# Altium PCB Dragonflyte.PcbDoc (part 2 of 3)
Units mil, origin at the board's own origin, x right, y up, seen from the top; angles counter-clockwise.
Board outline 1814.93 x 2125 mil, 6 copper layers (Component Side, Ground Plane (GND), Inner Layer 1, Inner Layer 2, Power Plane (VCC), Solder Side), stack 62.6 mil thick; 147 components, 158 nets, 1045 pads, 352 vias.
Unrouted connection lines stored in the file: 306.
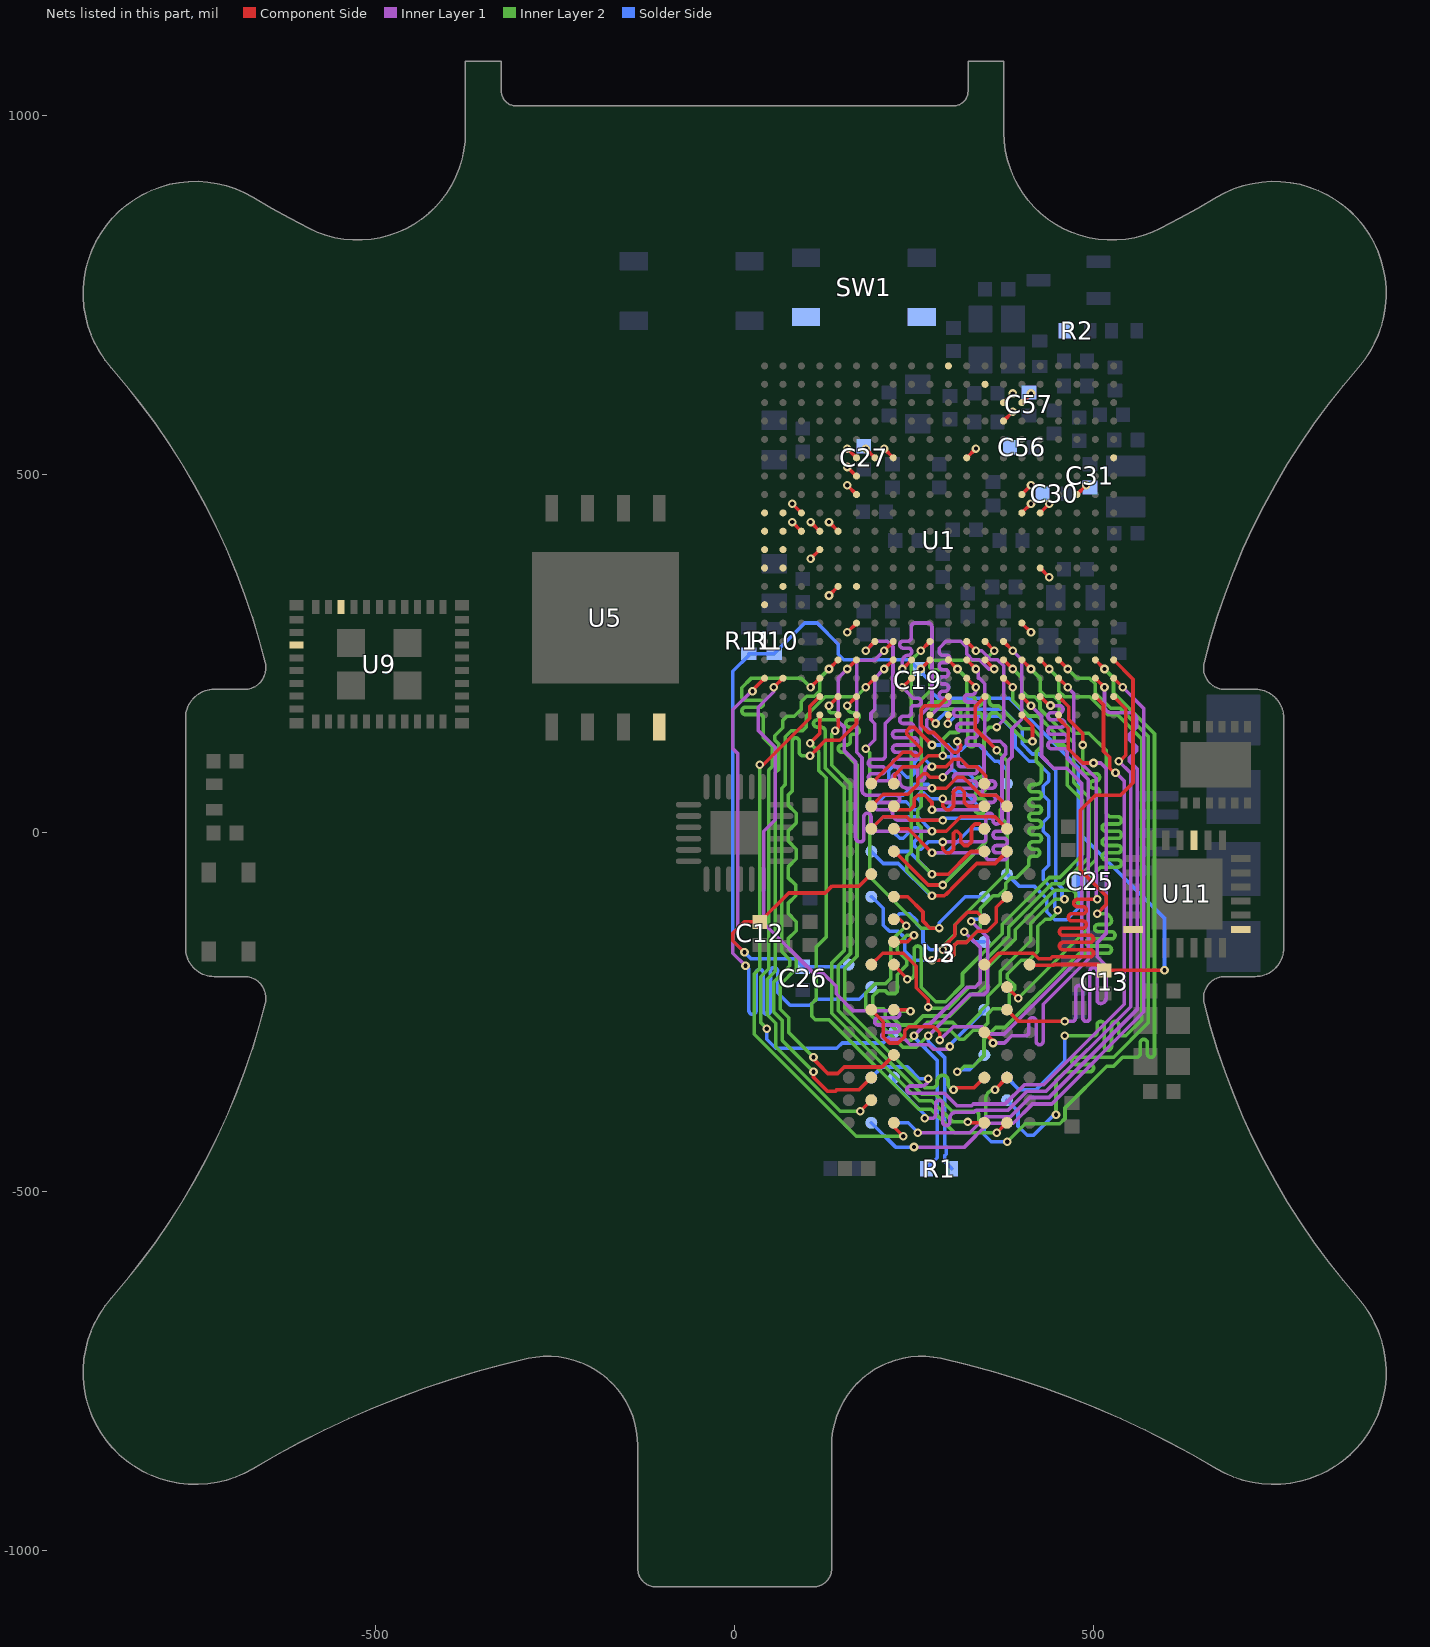
[diagram p6: the nets of this part, all layers, seen from the top]

## Via types
v1: diameter 12, hole 6, Component Side to Solder Side, tented both sides, 330 vias
v2: diameter 19.68, hole 7.87, Component Side to Solder Side, 12 vias
v3: diameter 12, hole 6, Component Side to Solder Side, 5 vias
v4: diameter 19.68, hole 11.81, Component Side to Solder Side, 5 vias

## Nets (pads, with @x,y where several pads share a name; then routed paths per layer and width w, separated by ;. In a path a pad name is that pad's centre, name@x,y a point inside that pad or via, vN(x,y) a via of type N, cw(c..) or ccw(c..) an arc to the next point about the centre after c; other vN are vias at no path point) (continued)
3V3: C56.2 C57.2 C62.2 C76.2 L1.2 R2.2 R4.2 R22.2 SW1.1 SW1.2 U1.P17 U1.P18 U1.R18 U4.1 U6.3 U8.13 U9.30 | length 54.3
  Component Side w5: U1.P17@374.39,573.84 v1(387.19,586.63) ; U1.P18@374.39,599.43 v1(387.19,612.23) ; U1.R18@399.98,599.43 v1(412.78,612.23)
3V3_SLOW: C27.2 C28.2 C29.2 C30.2 C31.2 C65.1 C74.1 C81.2 C83.2 L3.2 R14.2 R15.2 R16.2 R17.2 R18.2 R20.2 R21.2 R29.2 U1.E11 U1.F6 U1.F8 U1.F13 U1.F14 U1.F15 U1.G15 U1.H15 U1.L20 U1.M15 U1.N19 U1.R6 U1.R12 U1.R13 U1.T9 U1.T12 U1.V13 U1.Y15 U5.8 U7.10 U9.36 U11.1 U11.9 U11.18 | length 253.3
  Component Side w5: v1(131.28,433.09) U1.E11@144.07,420.3 ; v1(156.87,279.55) U1.F6@169.66,292.34 ; v1(156.87,484.27) U1.F13@169.66,471.48 ; v1(156.87,509.86) U1.F14@169.66,497.07 ; v1(156.87,535.45) U1.F15@169.66,522.66 ; v1(182.46,535.45) U1.G15@195.26,522.66 ; v1(208.05,535.45) U1.H15@220.85,522.66 ; U1.M15@323.21,522.66 v1(336,535.45) ; U1.R6@399.98,292.34 v1(412.78,279.55) ; U1.R12@399.98,445.89 v1(412.78,458.68) ; U1.R13@399.98,471.48 v1(412.78,484.27) ; U1.T9@425.57,369.11 v1(438.37,356.32) ; U1.T12@425.57,445.89 v1(438.37,458.68) ; U1.V13@476.75,471.48 v1(489.55,484.27)
CSI_D0: U1.D10 | length 18.1
  Component Side w5: v1(105.69,381.91) U1.D10@118.48,394.7
CSI_D1: U1.B8
CSI_D2: U1.C11 | length 18.1
  Component Side w5: v1(80.1,433.09) U1.C11@92.89,420.3
CSI_D3: U1.A9
CSI_D4: U1.A11
CSI_D5: U1.D11 | length 18.1
  Component Side w5: v1(105.69,433.09) U1.D11@118.48,420.3
CSI_D6: U1.B9
CSI_D7: U1.A12
CSI_D8: U1.A10
CSI_D9: U1.C12 | length 18.1
  Component Side w5: v1(80.1,458.68) U1.C12@92.89,445.89
CSI_D10: U1.E8 | length 18.1
  Component Side w5: v1(131.28,330.73) U1.E8@144.07,343.52
CSI_D11: U1.A7
CSI_HSYNC: U1.B12
CSI_PIXCLK: U1.B11
CSI_VSYNC: U1.B10
DDR_VREF: C12.2 C13.2 C19.2 C25.2 C26.2 R10.1 R11.2 U1.K4 U2.H1 U2.M8 U3.H1 U3.M8 | length 2214.3
  Component Side w5: v3(13.68,-166) 13.32,-166 -2.5,-150.18 -2.5,-139.82 13.46,-123.86 C12.2@35,-123.86 75.22,-83.64 126,-83.64 135.65,-73.99 173.61,-73.99 U2.M8@190.33,-57.26 ; v1(259.23,228.37) U1.K4@272.03,241.16 ; U2.H1@410.81,-183.25 411.56,-184 444.48,-184 445.23,-183.25 506.71,-183.25 C13.2@514.82,-191.36 v3(598.64,-191.36)
  Solder Side w5: U3.H1@158.84,-183.25 155.59,-186.5 94.96,-186.5 C26.2@94.82,-186.36 83.46,-175 22.68,-175 v3(13.68,-166) 13.32,-166 -2.5,-150.18 -2.5,225.18 19.82,247.5 R11.2@19.82,249.78 R10.1@54.82,249.78 97.54,292.5 114.82,292.5 144.37,262.95 144.37,248.78 151.69,241.46 242.01,241.46 C19.2@254.82,228.64 272.5,210.97 272.5,198.23 283.23,187.5 382.5,187.5 478.68,91.32 478.68,1.32 ; U3.M8@379.31,-57.26 396.04,-73.99 416.92,-73.99 434.57,-91.64 434.57,-109.93 445.64,-121 462.46,-121 478.68,-104.78 C25.2@478.68,-67.5 478.68,1.32 ; v3(598.64,-191.36) 598.64,-118.64 478.68,1.32
DRAM_A0: U1.N5 U2.N3 U3.N3 | length 623.1
  Component Side w5: v1(274.82,-57.5) 297.55,-57.5 327.19,-27.86 329.28,-25.77 U2.N3@347.81,-25.77 ; U1.N5@348.8,266.75 v1(361.59,253.96)
  Inner Layer 2 w5: v1(274.82,-57.5) 255.14,-37.82 255.14,-22.18 259.82,-17.5 259.82,7.82 255.14,12.5 255.14,32.5 259.82,37.18 259.82,185.69 271.73,197.6 271.73,212.5 cw(c276.73,212.5) 276.73,217.5 292.91,217.5 ccw(c292.91,222.5) 297.91,222.5 ccw(c292.91,222.5) 292.91,227.5 276.73,227.5 cw(c276.73,232.5) 271.73,232.5 cw(c280.1,232.5) 280.1,240.87 348.5,240.87 v1(361.59,253.96)
  Solder Side w5: U3.N3@221.83,-25.77 243.09,-25.77 v1(274.82,-57.5)
DRAM_A1: U1.P5 U2.P7 U3.P7 | length 648.2
  Component Side w5: U2.P7@221.83,5.73 241.59,5.73 v1(274.82,-27.5) ; U1.P5@374.39,266.75 v1(387.19,253.96)
  Inner Layer 1 w5: v1(274.82,-27.5) 344.82,-27.5 cw(c344.82,-32.5) 349.82,-32.5 ccw(c354.82,-32.5) 354.82,-37.5 374.82,-37.5 ccw(c374.82,-32.5) 379.82,-32.5 ccw(c374.82,-32.5) 374.82,-27.5 364.82,-27.5 cw(c364.82,-22.5) 359.82,-22.5 cw(c364.82,-22.5) 364.82,-17.5 374.82,-17.5 ccw(c374.82,-12.5) 379.82,-12.5 ccw(c374.82,-12.5) 374.82,-7.5 364.82,-7.5 cw(c364.82,-2.5) 359.82,-2.5 cw(c364.82,-2.5) 364.82,2.5 374.82,2.5 ccw(c374.82,9) 381.32,9 381.32,101.27 386.32,106.27 386.32,145.08 399.82,158.58 399.82,241.32 v1(387.19,253.96)
  Solder Side w5: v1(274.82,-27.5) 294.82,-27.5 328.05,5.73 U3.P7@347.81,5.73
DRAM_A2: U1.M4 U2.P3 U3.P3 | length 649.3
  Component Side w5: v1(289.82,-12.5) 289.82,-22.5 294.82,-27.5 299.82,-27.5 304.82,-22.5 304.82,-0.23 307.55,2.5 309.82,2.5 314.82,-2.5 314.82,-12.5 319.82,-17.5 324.82,-17.5 329.82,-12.5 329.82,7.5 334.82,12.5 341.04,12.5 U2.P3@347.81,5.73 ; U1.M4@323.21,241.16 v1(336,228.37)
  Inner Layer 1 w5: v1(289.82,-12.5) 344.82,-12.5 ccw(c344.82,-7.5) 349.82,-7.5 349.82,22.5 cw(c354.82,22.5) 354.82,27.5 cw(c354.82,22.5) 359.82,22.5 359.82,17.5 ccw(c364.82,17.5) 364.82,12.5 ccw(c364.82,20) 372.32,20 372.32,105 377.32,110 377.32,120.36 370,127.68 356.97,127.68 348.5,136.14 348.5,207.95 341.18,215.27 339.5,215.27 339.5,224.87 v1(336,228.37)
  Solder Side w5: U3.P3@221.83,5.73 221.83,0.49 229.82,-7.5 234.82,-7.5 249.82,7.5 254.82,7.5 259.82,2.5 259.82,-2.5 249.82,-12.5 249.82,-17.5 254.82,-22.5 259.82,-22.5 269.82,-12.5 v1(289.82,-12.5)
DRAM_A3: U1.K5 U2.N2 U3.N2 | length 622.4
  Component Side w5: v1(259.23,253.96) U1.K5@272.03,266.75 ; v1(274.82,-87.5) 292.09,-87.5 294.59,-85 295,-85 302.32,-77.68 302.32,-77.27 337.1,-42.5 353.94,-42.5 362.58,-42.5 U2.N2@379.31,-25.77
  Inner Layer 2 w5: v1(259.23,253.96) 246.14,240.87 246.14,-26.18 239.82,-32.5 239.82,-52.5 v1(274.82,-87.5)
  Solder Side w5: U3.N2@190.33,-25.77 207.06,-42.5 227.95,-42.5 272.95,-87.5 v1(274.82,-87.5)
DRAM_A4: U1.H5 U2.P8 U3.P8 | length 655.9
  Component Side w5: U2.P8@190.33,5.73 207.06,22.46 227.95,22.46 227.99,22.5 239.82,22.5 244.82,17.5 v1(289.82,17.5) ; v1(208.05,253.96) U1.H5@220.85,266.75
  Inner Layer 1 w5: 169.96,112.32 177.28,105 177.28,60.04 ccw(c184.82,60.04) 184.82,52.5 224.82,52.5 cw(c224.82,47.5) 229.82,47.5 cw(c224.82,47.5) 224.82,42.5 199.82,42.5 ccw(c199.82,37.5) 194.82,37.5 ccw(c199.82,37.5) 199.82,32.5 214.82,32.5 cw(c214.82,27.5) 219.82,27.5 ccw(c229.82,27.5) 229.82,17.5 v1(289.82,17.5) ; 169.96,112.36 169.82,112.5 169.82,237.5 173.19,240.87 194.96,240.87 v1(208.05,253.96)
  Solder Side w5: v1(289.82,17.5) 292.82,20.5 364.54,20.5 U3.P8@379.31,5.73
DRAM_A5: U1.F4 U2.P2 U3.P2 | length 653.6
  Component Side w5: v1(156.87,228.37) U1.F4@169.66,241.16 ; v1(274.82,2.5) 294.82,2.5 314.78,22.46 362.58,22.46 U2.P2@379.31,5.73
  Inner Layer 1 w5: v1(156.87,228.37) 144.37,215.87 144.37,155.63 152.32,147.68 152.32,115 168.28,99.04 168.28,-5.96 ccw(c174.82,-5.96) 174.82,-12.5 ccw(c174.82,-7.5) 179.82,-7.5 179.82,22.5 cw(c184.82,22.5) 184.82,27.5 cw(c184.82,22.5) 189.82,22.5 189.82,7.5 ccw(c194.82,7.5) 194.82,2.5 v1(274.82,2.5)
  Solder Side w5: U3.P2@190.33,5.73 207.06,22.46 227.95,22.46 227.99,22.5 254.82,22.5 v1(274.82,2.5)
DRAM_A6: U1.N4 U2.R8 U3.R8 | length 653.7
  Component Side w5: U2.R8@190.33,37.22 207.06,53.95 241.28,53.95 254.82,67.5 254.82,74.77 262.55,82.5 267.14,82.5 272.14,77.5 v1(289.82,77.5) ; U1.N4@348.8,241.16 v1(361.59,228.37)
  Inner Layer 1 w5: v1(289.82,77.5) 302.32,90 302.32,112.68 280,135 279.64,135 267.32,147.32 267.32,157.68 287.14,177.5 294.82,177.5 ccw(c294.82,182.5) 299.82,182.5 ccw(c294.82,182.5) 294.82,187.5 289.82,187.5 cw(c289.82,192.5) 284.82,192.5 cw(c289.82,192.5) 289.82,197.5 292.91,197.5 ccw(c292.91,202.5) 297.91,202.5 ccw(c292.91,202.5) 292.91,207.5 289.82,207.5 cw(c289.82,212.5) 284.82,212.5 cw(c289.82,212.5) 289.82,217.5 292.91,217.5 ccw(c292.91,222.5) 297.91,222.5 ccw(c292.91,222.5) 292.91,227.5 289.82,227.5 cw(c289.82,232.5) 284.82,232.5 cw(c289.82,232.5) 289.82,237.5 295.87,237.5 ccw(c295.87,241.46) 299.82,241.46 299.82,242.5 ccw(c294.82,242.5) 294.82,247.5 289.82,247.5 cw(c289.82,252.5) 284.82,252.5 284.82,257.5 294.37,267.05 315,267.05 323.5,258.54 323.5,248.78 330.83,241.46 340.59,241.46 353.68,228.37 v1(361.59,228.37)
  Solder Side w5: v1(289.82,77.5) 299.82,87.5 304.82,87.5 309.82,82.5 326.27,82.5 333.05,75.72 333.05,62.6 343.15,52.5 364.03,52.5 U3.R8@379.31,37.22
DRAM_A7: U1.G5 U2.R2 U3.R2 | length 647.3
  Component Side w5: v1(182.46,253.96) U1.G5@195.26,266.75 ; v1(274.82,62.5) 294.82,62.5 309.82,77.5 318.15,77.5 343.15,52.5 364.03,52.5 U2.R2@379.31,37.22
  Inner Layer 1 w5: v1(182.46,253.96) 195.55,267.05 212.64,267.05 220.55,259.13 220.55,163.23 209.82,152.5 209.82,107.5 cw(c204.82,107.5) 204.82,102.5 191.28,102.5 ccw(c191.28,97.5) 186.28,97.5 ; 186.28,96.04 186.28,97.5 ; v1(274.82,62.5) 239.82,62.5 cw(c239.82,72.5) 229.82,72.5 229.82,77.5 ccw(c224.82,77.5) 224.82,82.5 ccw(c224.82,77.5) 219.82,77.5 cw(c214.82,77.5) 214.82,72.5 191.28,72.5 cw(c191.28,77.5) 186.28,77.5 cw(c191.28,77.5) 191.28,82.5 204.82,82.5 ccw(c204.82,87.5) 209.82,87.5 ccw(c204.82,87.5) 204.82,92.5 191.28,92.5 cw(c191.28,97.5) 186.28,97.5
  Solder Side w5: U3.R2@190.33,37.22 194.55,37.22 209.82,52.5 234.82,52.5 249.82,67.5 269.82,67.5 v1(274.82,62.5)
DRAM_A8: U1.J4 U2.T8 U3.T8 | length 650.6
  Component Side w5: U2.T8@196.04,68.72 U2.T8@190.33,68.72 234.11,112.5 244.82,112.5 249.82,107.5 254.82,107.5 259.82,112.5 259.82,117.5 239.82,137.5 239.82,142.5 244.82,147.5 249.82,147.5 v1(274.82,122.5) ; v1(233.64,228.37) U1.J4@246.44,241.16
  Inner Layer 1 w5: v1(233.64,228.37) 233.64,239.41 cw(c241.73,239.41) 241.73,247.5 ccw(c241.73,252.5) 246.73,252.5 ccw(c241.73,252.5) 241.73,257.5 234.82,257.5 cw(c234.82,262.5) 229.82,262.5 cw(c234.37,262.5) 234.37,267.05 240.69,267.05 ccw(c240.69,272.5) 246.14,272.5 246.14,287.5 cw(c251.14,287.5) 251.14,292.5 269.82,292.5 cw(c269.82,287.5) 274.82,287.5 274.82,180.23 258.32,163.73 258.32,139 v1(274.82,122.5)
  Solder Side w5: v1(274.82,122.5) 297.32,122.5 297.32,122.32 304.64,115 315,115 322.32,122.32 322.32,122.5 339.82,122.5 362.32,100 367.5,100 379.82,87.68 379.82,69.23 U3.T8@379.31,68.72
DRAM_A9: U1.L2 U2.R3 U3.R3 | length 636.1
  Component Side w5: v1(289.82,47.5) 289.82,37.5 294.82,32.5 299.82,32.5 304.82,37.5 304.82,57.5 309.82,62.5 314.82,62.5 319.82,57.5 319.82,42.5 325.1,37.22 U2.R3@347.81,37.22 ; U1.L2@297.62,189.98 284.82,177.19 264.51,177.19 259.82,172.5 259.82,150.23 270.05,140 277.32,140 304.82,112.5 309.82,112.5 314.82,117.5 314.82,122.5 v1(309.82,127.5)
  Inner Layer 1 w5: v1(289.82,47.5) ccw(c294.82,47.5) 294.82,42.5 329.82,42.5 ccw(c329.82,47.5) 334.82,47.5 ccw(c329.82,47.5) 329.82,52.5 309.82,52.5 cw(c309.82,57.5) 304.82,57.5 cw(c309.82,57.5) 309.82,62.5 332.37,62.5 ccw(c332.37,67.5) 337.37,67.5 ccw(c332.37,67.5) 332.37,72.5 309.82,72.5 cw(c309.82,77.5) 304.82,77.5 cw(c309.82,77.5) 309.82,82.5 333.32,82.5 ccw(c333.32,87.5) 338.32,87.5 ccw(c333.32,87.5) 333.32,92.5 314.82,92.5 cw(c314.82,96) 311.32,96 311.32,126 v1(309.82,127.5)
  Solder Side w5: U3.R3@221.83,37.22 228.11,43.5 238.82,43.5 249.82,32.5 254.82,32.5 259.82,37.5 259.82,42.5 254.82,47.5 254.82,52.5 258.48,56.16 263.48,56.16 272.14,47.5 v1(289.82,47.5)
DRAM_A10: U1.H4 U2.L7 U3.L7 | length 624.8
  Component Side w5: v1(208.05,228.37) U1.H4@220.85,241.16 ; U2.L7@221.83,-88.76 241.08,-88.76 262.32,-110 262.32,-122.68 272.14,-132.5 v1(284.82,-132.5)
  Inner Layer 1 w5: v1(182.46,117.5) 194.96,130 194.96,152.36 189.82,157.5 189.82,166.87 194.96,172.01 194.96,215.27 v1(208.05,228.37)
  Inner Layer 2 w5: v1(182.46,117.5) 188.32,111.64 188.32,-61 259.82,-132.5 v1(284.82,-132.5)
  Solder Side w5: v1(284.82,-132.5) 284.82,-125.18 321.24,-88.76 U3.L7@347.81,-88.76
DRAM_A11: U1.M3 U2.R7 U3.R7 | length 655.7
  Component Side w5: U2.R7@221.83,37.22 226.55,32.5 244.82,32.5 249.82,37.5 249.82,47.5 254.82,52.5 264.82,52.5 274.82,42.5 v1(274.82,32.5) ; U1.M3@323.21,215.57 v1(336,202.77)
  Inner Layer 1 w5: v1(274.82,32.5) 339.82,32.5 349.82,42.5 358.32,42.5 ccw(c358.32,47.5) 363.32,47.5 ccw(c358.32,47.5) 358.32,52.5 349.73,52.5 cw(c349.73,57.41) 344.82,57.41 cw(c349.92,57.41) 349.92,62.5 358.32,62.5 ccw(c358.32,67.5) 363.32,67.5 ccw(c358.32,67.5) 358.32,72.5 353.57,72.5 cw(c353.57,78.75) 347.32,78.75 347.32,115 ccw(c339.82,115) 339.82,122.5 327.32,122.5 cw(c327.32,127.5) 322.32,127.5 cw(c327.32,127.5) 327.32,132.5 333.32,132.5 ccw(c333.32,137.5) 338.32,137.5 ccw(c333.32,137.5) 333.32,142.5 314.32,142.5 cw(c314.32,147.5) 309.32,147.5 cw(c314.32,147.5) 314.32,152.5 333.32,152.5 ccw(c333.32,157.5) 338.32,157.5 ccw(c333.32,157.5) 333.32,162.5 309.82,162.5 cw(c309.82,167.5) 304.82,167.5 cw(c309.82,167.5) 309.82,172.5 333.32,172.5 ccw(c333.32,177.5) 338.32,177.5 ccw(c333.32,177.5) 333.32,182.5 324.82,182.5 cw(c324.82,187.5) 319.82,187.5 cw(c324.82,187.5) 324.82,192.5 329.82,192.5 ccw(c329.82,198.68) 336,198.68 v1(336,202.77) v1@334.82,201.59
  Solder Side w5: v1(274.82,32.5) 294.82,32.5 304.82,42.5 304.82,52.5 309.82,57.5 319.82,57.5 340.1,37.22 U3.R7@347.81,37.22
DRAM_A12: U1.M5 U2.N7 U3.N7 | length 638.5
  Component Side w5: U2.N7@221.83,-25.77 223.09,-25.77 269.82,-72.5 v1(289.82,-72.5) ; U1.M5@323.21,266.75 v1(336,253.96)
  Inner Layer 1 w5: v1(336,253.96) 343.92,253.96 356.42,241.46 366.18,241.46 374.69,232.95 374.69,197.6 374.82,197.46 374.82,157.5 v1(364.82,147.5)
  Inner Layer 2 w5: v1(289.82,-72.5) 349.82,-12.5 349.82,22.5 ccw(c344.82,22.5) 344.82,27.5 339.82,27.5 cw(c339.82,32.5) 334.82,32.5 cw(c339.82,32.5) 339.82,37.5 344.82,37.5 ccw(c344.82,42.5) 349.82,42.5 ccw(c344.82,42.5) 344.82,47.5 339.82,47.5 cw(c339.82,52.5) 334.82,52.5 cw(c339.82,52.5) 339.82,57.5 344.82,57.5 ccw(c344.82,62.5) 349.82,62.5 ccw(c344.82,62.5) 344.82,67.5 339.82,67.5 cw(c339.82,72.5) 334.82,72.5 cw(c339.82,72.5) 339.82,77.5 ccw(c339.82,85) 347.32,85 347.32,140 354.82,147.5 v1(364.82,147.5)
  Solder Side w5: v1(289.82,-72.5) 336.55,-25.77 U3.N7@347.81,-25.77
DRAM_A13: U1.J3 U2.T3 U3.T3 | length 634.5
  Component Side w5: v1(233.64,202.77) U1.J3@246.44,215.57 ; v1(274.82,92.5) 294.82,92.5 304.82,102.5 314.82,102.5 324.82,92.5 337.14,92.5 349.82,79.82 349.82,70.73 U2.T3@347.81,68.72
  Inner Layer 1 w5: 229.82,157.5 ccw(c234.82,157.5) 234.82,152.5 ; v1(233.64,202.77) 248.92,187.5 254.82,187.5 cw(c254.82,182.5) 259.82,182.5 cw(c254.82,182.5) 254.82,177.5 249.82,177.5 ccw(c249.82,173.82) 246.14,173.82 246.14,167.5 cw(c241.14,167.5) 241.14,162.5 234.82,162.5 ccw(c234.82,157.5) 234.82,152.5 ; v1(274.82,92.5) 269.82,92.5 ccw(c269.82,87.5) 264.82,87.5 264.82,77.5 cw(c259.82,77.5) 259.82,72.5 cw(c259.82,77.5) 254.82,77.5 254.82,87.5 ccw(c249.82,87.5) 249.82,92.5 224.82,92.5 cw(c224.82,97.5) 219.82,97.5 cw(c224.82,97.5) 224.82,102.5 249.82,102.5 ccw(c249.82,107.5) 254.82,107.5 ccw(c249.82,107.5) 249.82,112.5 224.82,112.5 cw(c224.82,117.5) 219.82,117.5 cw(c224.82,117.5) 224.82,122.5 249.82,122.5 ccw(c249.82,127.5) 254.82,127.5 ccw(c249.82,127.5) 249.82,132.5 224.82,132.5 cw(c224.82,137.5) 219.82,137.5 cw(c224.82,137.5) 224.82,142.5 243.82,142.5 ccw(c243.82,148) 249.32,148 ccw(c244.82,148) 244.82,152.5 234.82,152.5
  Solder Side w5: U3.T3@221.83,68.72 214.82,75.73 214.82,87.5 219.82,92.5 224.82,92.5 239.82,77.5 244.82,77.5 249.82,82.5 249.82,97.5 254.82,102.5 264.82,102.5 v1(274.82,92.5)
DRAM_A14: U1.R1 U2.T7 U3.T7 | length 624.1
  Component Side w5: U2.T7@221.83,68.72 223.05,67.5 223.05,80.73 234.82,92.5 254.82,92.5 269.82,107.5 v1(289.82,107.5) ; U1.R1@399.98,164.39 399.82,164.23 414.82,149.23 v1(414.82,127.5)
  Inner Layer 2 w5: v1(289.82,107.5) 289.82,130.18 299.64,140 cw(c299.82,127.5) 299.82,140 309.32,140 ccw(c309.32,145.5) 314.82,145.5 314.82,167.5 ccw(c309.82,167.5) 309.82,172.5 274.82,172.5 cw(c274.82,177.5) 269.82,177.5 cw(c274.82,177.5) 274.82,182.5 319.82,182.5 cw(c319.82,177.5) 324.82,177.5 324.82,125 ccw(c329.82,125) 329.82,120 ccw(c329.82,125) 334.82,125 334.82,162.5 cw(c339.82,162.5) 339.82,167.5 cw(c339.82,162.5) 344.82,162.5 ccw(c349.82,162.5) 349.82,157.5 ccw(c349.82,162.5) 354.82,162.5 cw(c359.82,162.5) 359.82,167.5 364.82,167.5 404.82,127.5 v1(414.82,127.5)
  Solder Side w5: v1(289.82,107.5) 291.32,106 311.32,106 324.82,92.5 339.82,92.5 347.32,85 347.32,69.21 U3.T7@347.81,68.72
DRAM_CAS: U1.N2 U2.K3 U3.K3 | length 622.6
  Component Side w5: v1(289.82,-162.5) 292.14,-162.5 292.14,-157.45 306.32,-143.27 306.32,-128.32 317.32,-117.32 324.37,-110.28 337.83,-110.28 U2.K3@347.81,-120.26 ; U1.N2@348.8,189.98 334.82,176 334.82,145.63 364.82,115.63 v1(364.82,115.18)
  Inner Layer 2 w5: v1(289.82,-162.5) 289.82,-157.91 307.32,-140.41 307.32,-127.32 379.82,-54.82 379.82,12.5 369.82,22.5 369.82,32.5 379.82,42.5 379.82,100.18 v1(364.82,115.18)
  Solder Side w5: U3.K3@221.83,-120.26 229.59,-112.5 243.96,-112.5 253.32,-121.86 253.32,-126.41 262.32,-135.41 262.32,-152.68 272.14,-162.5 v1(289.82,-162.5)
DRAM_CLK_N: R1.2 U1.L1 U2.K7 U3.K7 | length 1468
  Component Side w5: U2.K7@221.83,-120.26 229.9,-120.26 v1(238.78,-129.14) ; v1(296.82,152.18) 297.62,152.97 U1.L1@297.62,164.39
  Inner Layer 1 w5: v1(269.82,-282.5) 274.82,-277.5 ; 274.83,-277.5 327.33,-225 347.32,-225 352.32,-220 352.32,-210 352.32,-145.55 v1(329.55,-122.78)
  Inner Layer 2 w5: v1(238.78,-129.14) 217.32,-150.6 217.32,-202.68 210,-210 195.5,-210 182.32,-223.18 182.32,-246.36 234.46,-298.5 252.91,-298.5 268.91,-282.5 v1(269.82,-282.5) 278.32,-274 299.5,-274 313,-287.5 319.34,-287.5 332.08,-274.76 342.56,-274.76 352.24,-265.09 352.24,-252.32 359.56,-245 361.84,-245 377.32,-245 382.32,-240 382.32,-225.08 384.82,-222.58 384.82,-222.5 389.82,-217.5 389.82,-212.5 379.82,-202.5 379.82,-196.64 398.96,-177.5 409.82,-177.5 422.32,-165 422.32,-130.05 432.37,-120 439.82,-120 449.82,-110 v1(449.82,-107.5) v1@447.14,-107.5
  Solder Side w5: v1(269.82,-282.5) 269.82,-290.18 292.32,-312.68 292.32,-435 294.82,-437.5 294.82,-447.5 292.32,-450 292.32,-457.28 R1.2@302.54,-467.5 ; v1(296.82,152.18) 307.14,162.5 368.91,162.5 389.49,141.92 390.53,140.88 390.53,119.98 410.5,100 420,100 437.32,82.68 437.32,72.5 429.82,65 429.82,52.5 437.32,45 437.32,22.5 429.82,15 429.82,2.5 437.32,-5 437.32,-45 429.82,-52.5 429.82,-65 445.98,-81.16 445.98,-103.66 v1(449.82,-107.5) ; v1(329.55,-122.78) 332.07,-120.26 U3.K7@347.81,-120.26
DRAM_CLK_P: R1.1 U1.K1 U2.J7 U3.J7 | length 1471
  Component Side w5: U2.J7@221.83,-151.75 240.57,-151.75 v1(249.82,-142.5) ; U1.K1@272.58,164.39 U1.K1@272.03,164.39 272.03,160.3 v1(279.82,152.5)
  Inner Layer 1 w5: v1(249.82,-282.5) 264.82,-267.5 270.68,-267.5 323.18,-215 335,-215 342.32,-207.68 342.32,-205.86 342.32,-160 v1(319.82,-137.5)
  Inner Layer 2 w5: v1@244.37,-142.64 239.68,-142.64 226.51,-155.81 226.51,-164.19 239.82,-177.5 239.82,-184.01 226.51,-197.32 226.51,-220.81 223.66,-223.66 213.66,-223.66 210,-220 199.64,-220 192.32,-227.32 192.32,-242.22 195.1,-245 207.32,-245 209.82,-247.5 209.82,-259.72 238.9,-288.8 246.12,-288.8 249.82,-285.1 v1(249.82,-282.5) 268.32,-264 303.64,-264 309.64,-270 322.7,-270 342.24,-250.46 342.24,-248.18 352.53,-237.89 352.32,-237.68 352.32,-227.32 369.82,-209.82 369.82,-192.5 412.32,-150 412.32,-125.91 445.73,-92.5 v1(459.48,-92.5) ; v1@244.51,-142.5 v1(249.82,-142.5)
  Solder Side w5: v1(249.82,-282.5) 249.82,-284.32 282.32,-316.82 282.32,-452.28 R1.1@267.11,-467.5 ; v1(279.82,152.5) 279.82,154.27 298.05,172.5 373.05,172.5 400.53,145.02 400.53,124.12 414.64,110 424.14,110 447.32,86.82 447.32,-68.36 455.98,-77.02 455.98,-88.66 459.48,-92.16 v1(459.48,-92.5) ; v1(319.82,-137.5) 334.07,-151.75 U3.J7@347.81,-151.75
DRAM_CS: U1.L4 U2.L2 U3.L2 | length 1059.3
  Component Side w5: v1(274.82,-177.5) 297.5,-177.5 304.85,-170.15 304.85,-157.47 309.8,-152.53 322.47,-152.53 338.02,-136.98 351.97,-136.98 364.54,-124.41 364.54,-103.53 U2.L2@379.31,-88.76 ; U1.L4@297.62,241.16 v1(310.41,228.37)
  Inner Layer 2 w5: v1(274.82,-177.5) 297.5,-177.5 304.82,-170.18 304.82,-157.5 309.82,-152.5 322.5,-152.5 342.05,-132.95 342.05,-105.33 359.87,-87.5 367.5,-87.5 377.35,-77.65 377.35,-70.03 384.85,-62.53 392.47,-62.53 409.82,-45.18 409.82,-37.5 cw(c414.82,-37.5) 414.82,-32.5 419.82,-32.5 ccw(c419.82,-27.5) 424.82,-27.5 ccw(c419.82,-27.5) 419.82,-22.5 414.82,-22.5 cw(c414.82,-17.5) 409.82,-17.5 cw(c414.82,-17.5) 414.82,-12.5 422.32,-12.5 ccw(c422.32,-7.5) 427.32,-7.5 ccw(c422.32,-7.5) 422.32,-2.5 414.82,-2.5 cw(c414.82,2.5) 409.82,2.5 cw(c414.82,2.5) 414.82,7.5 422.32,7.5 ccw(c422.32,12.5) 427.32,12.5 ccw(c422.32,12.5) 422.32,17.5 414.82,17.5 cw(c414.82,22.5) 409.82,22.5 cw(c414.82,22.5) 414.82,27.5 422.32,27.5 ccw(c422.32,32.5) 427.32,32.5 ccw(c422.32,32.5) 422.32,37.5 414.82,37.5 cw(c414.82,42.5) 409.82,42.5 cw(c414.82,42.5) 414.82,47.5 422.32,47.5 ccw(c422.32,52.5) 427.32,52.5 ccw(c422.32,52.5) 422.32,57.5 414.82,57.5 cw(c414.82,62.5) 409.82,62.5 cw(c414.82,62.5) 414.82,67.5 419.82,67.5 ccw(c419.82,75) 427.32,75 427.32,92.68 419.82,100.18 419.82,112.91 427.32,120.41 427.32,132.68 415,145 400.05,145 367.81,177.24 360.08,177.24 359.82,177.5 cw(c359.82,182.5) 354.82,182.5 354.82,186.77 ccw(c349.09,186.77) 349.09,192.5 ccw(c349.09,188.23) 344.82,188.23 344.82,182.5 cw(c339.82,182.5) 339.82,177.5 cw(c339.82,182.5) 334.82,182.5 334.82,185.37 ccw(c329.92,185.37) 329.92,190.27 cw(c329.92,196.69) 323.5,196.69 323.5,215.27 v1(310.41,228.37)
  Solder Side w5: U3.L2@190.33,-88.76 191.08,-88.76 207.06,-104.74 207.06,-128.33 215.71,-136.98 227.95,-136.98 236.6,-145.64 236.6,-164.4 249.69,-177.5 v1(274.82,-177.5)
DRAM_D0: U1.T2 U2.E3 | length 817.3
  Component Side w5: U2.E3@347.81,-277.74 359.82,-289.74 v1(359.82,-292.5) ; U1.T2@425.57,189.98 438.05,177.5 v1(439.82,177.5)
  Inner Layer 1 w5: v1(359.82,-292.5) 375.71,-292.5 385.71,-282.5 404.82,-282.5 ccw(c404.82,-277.5) 409.82,-277.5 409.82,-262.5 cw(c414.82,-262.5) 414.82,-257.5 cw(c414.82,-262.5) 419.82,-262.5 419.82,-290 ccw(c424.82,-290) 424.82,-295 ccw(c424.82,-290.23) 429.6,-290.23 429.6,-238.62 492.32,-175.89 492.32,74.59 463.32,103.59 463.32,112.5 ccw(c458.32,112.5) 458.32,117.5 441.32,117.5 cw(c441.32,122.5) 436.32,122.5 ; 436.32,121 436.32,122.5 ; v1@439.82,175.73 v1(439.82,177.5) 452.32,177.5 cw(c452.32,172.5) 457.32,172.5 cw(c452.32,172.5) 452.32,167.5 441.32,167.5 ccw(c441.32,162.5) 436.32,162.5 ccw(c441.32,162.5) 441.32,157.5 454.82,157.5 cw(c454.82,152.5) 459.82,152.5 cw(c454.82,152.5) 454.82,147.5 441.32,147.5 ccw(c441.32,142.5) 436.32,142.5 ccw(c441.32,142.5) 441.32,137.5 458.32,137.5 cw(c458.32,132.5) 463.32,132.5 cw(c458.32,132.5) 458.32,127.5 441.32,127.5 ccw(c441.32,122.5) 436.32,122.5
DRAM_D1: U1.U2 U2.F7 | length 784.6
  Component Side w5: U2.F7@221.83,-246.24 242.56,-246.24 v1(244.82,-248.5) ; U1.U2@451.16,189.98 465.33,175.81 465.33,158.13 484.82,138.64 v1(484.82,122.5)
  Inner Layer 2 w5: v1(244.82,-248.5) 223.82,-248.5 219.82,-252.5 219.82,-256.99 230.33,-267.5 249.82,-267.5 262.32,-255 299.64,-255 330.64,-224 338.73,-224 351.32,-211.41 351.32,-187.32 390.82,-147.82 390.82,-134.68 445.5,-80 469.82,-80 cw(c469.82,-85) 474.82,-85 474.82,-92.5 ccw(c479.82,-92.5) 479.82,-97.5 ccw(c479.82,-94) 483.32,-94 483.32,-56.73 502.82,-37.23 502.82,52.63 503.46,52.63 ccw(c503.46,57.5) 508.32,57.5 ccw(c503.32,57.5) 503.32,62.5 499.82,62.5 cw(c499.82,67.5) 494.82,67.5 cw(c499.82,67.5) 499.82,72.5 503.32,72.5 ccw(c503.32,77.5) 508.32,77.5 ccw(c503.32,77.5) 503.32,82.5 489.82,82.5 cw(c489.82,87.5) 484.82,87.5 v1(484.82,122.5)
DRAM_D2: U1.U1 U2.F2 | length 803.7
  Component Side w5: U2.F2@379.31,-246.24 395.57,-262.5 v1(459.82,-262.5) ; U1.U1@451.16,164.39 451.16,159.57 464.82,145.91 464.82,117.5 484.82,97.5 v1(499.82,97.5)
  Inner Layer 1 w5: v1(459.82,-262.5) 469.82,-262.5 ccw(c469.82,-257.5) 474.82,-257.5 474.82,-217.5 cw(c479.82,-217.5) 479.82,-212.5 cw(c479.82,-217.5) 484.82,-217.5 484.82,-257.5 ccw(c489.82,-257.5) 489.82,-262.5 ccw(c489.82,-257.5) 494.82,-257.5 494.82,-192.5 cw(c499.82,-192.5) 499.82,-187.5 cw(c499.82,-192.5) 504.82,-192.5 504.82,-232.5 ccw(c509.82,-232.5) 509.82,-237.5 ccw(c509.82,-230) 517.32,-230 517.32,-185 504.82,-172.5 504.82,-152.5 517.32,-140 517.32,90 509.82,97.5 v1(499.82,97.5)
DRAM_D3: U1.R2 U2.F8 | length 815.5
  Component Side w5: U2.F8@190.33,-246.24 207.06,-262.97 207.06,-283.85 215.71,-292.5 227.95,-292.5 236.6,-283.85 236.6,-275.7 242.29,-270 253.73,-270 277.32,-270 285.82,-278.5 v1(285.82,-288.5) ; U1.R2@399.98,189.98 v1(412.78,177.18)
  Inner Layer 1 w5: v1(285.82,-288.5) 304.32,-270 344.44,-270 354.44,-280 372.25,-280 375.48,-280 483.32,-172.16 483.32,69 462.32,90 444.64,90 427.32,107.32 427.32,162.64 v1(412.78,177.18)
DRAM_D4: U1.U3 U2.H3 | length 818.6
  Component Side w5: U2.H3@347.81,-183.25 351.8,-183.25 367.55,-167.5 415.94,-167.5 423.44,-175 440,-175 442.5,-172.5 494.82,-172.5 ccw(c494.82,-167.5) 499.82,-167.5 ccw(c494.82,-167.5) 494.82,-162.5 457.32,-162.5 cw(c457.32,-157.5) 452.32,-157.5 cw(c457.32,-157.5) 457.32,-152.5 494.82,-152.5 ccw(c494.82,-147.5) 499.82,-147.5 ccw(c494.82,-147.5) 494.82,-142.5 457.32,-142.5 cw(c457.32,-137.5) 452.32,-137.5 cw(c457.32,-137.5) 457.32,-132.5 484.82,-132.5 ccw(c484.82,-127.5) 489.82,-127.5 ccw(c484.82,-127.5) 484.82,-122.5 469.82,-122.5 cw(c469.82,-117.5) 464.82,-117.5 cw(c469.82,-117.5) 469.82,-112.5 484.82,-112.5 ccw(c484.82,-107.5) 489.82,-107.5 ccw(c484.82,-107.5) 484.82,-102.5 477.32,-102.5 cw(c477.32,-97.5) 472.32,-97.5 cw(c477.32,-97.5) 477.32,-92.5 v1(504.82,-92.5) ; U1.U3@451.16,215.57 v1(463.96,202.77)
  Inner Layer 1 w5: v1(463.96,202.77) 472.32,194.41 472.32,107.32 503.5,76.14 503.5,-91.18 v1(504.82,-92.5)
DRAM_D5: U1.R4 U2.G2 | length 787.5
  Component Side w5: U2.G2@379.31,-214.74 v1(394.82,-230.26) ; U1.R4@399.98,241.16 v1(412.78,228.37)
  Inner Layer 2 w5: v1(394.82,-230.26) 492.32,-132.76 492.32,-65 509.82,-47.5 533.82,-47.5 ccw(c533.82,-42.5) 538.82,-42.5 ccw(c533.82,-42.5) 533.82,-37.5 516.82,-37.5 cw(c516.82,-32.5) 511.82,-32.5 cw(c516.82,-32.5) 516.82,-27.5 533.82,-27.5 ccw(c533.82,-22.5) 538.82,-22.5 ccw(c533.82,-22.5) 533.82,-17.5 516.82,-17.5 cw(c516.82,-12.5) 511.82,-12.5 cw(c516.82,-12.5) 516.82,-7.5 533.82,-7.5 ccw(c533.82,-2.5) 538.82,-2.5 ccw(c533.82,-2.5) 533.82,2.5 516.82,2.5 cw(c516.82,7.5) 511.82,7.5 cw(c516.82,7.5) 516.82,12.5 533.82,12.5 ccw(c533.82,17.5) 538.82,17.5 ccw(c533.82,17.5) 533.82,22.5 524.82,22.5 cw(c524.82,30) 517.32,30 517.32,52.24 517.5,52.42 517.5,114.82 493.23,139.09 473.23,139.09 452.32,160 452.32,182.68 444.73,190.27 433.19,190.27 425.87,197.6 425.87,215.27 v1(412.78,228.37)
DRAM_D6: U1.P3 U2.H7 | length 783.5
  Component Side w5: U2.H7@221.83,-183.25 221.83,-184.23 240.46,-202.87 v1(240.46,-203.95) ; U1.P3@374.39,215.57 v1(387.19,202.77)
  Inner Layer 2 w5: v1(240.46,-203.95) 243.37,-203.95 244.82,-202.5 ccw(c244.82,-197.5) 249.82,-197.5 249.82,-162.5 cw(c254.82,-162.5) 254.82,-157.5 cw(c254.82,-162.5) 259.82,-162.5 259.82,-214.82 280,-235 294.19,-235 317.32,-211.87 317.32,-195.86 372.82,-140.36 372.82,-127.22 438.05,-62 452.59,-62 484.82,-29.77 484.82,45.18 463.32,66.68 463.32,117.5 458.32,122.5 449.82,122.5 445.32,127 445.32,140.13 422.46,163 409.28,163 387.19,185.1 v1(387.19,202.77)
DRAM_D7: U1.P4 U2.H8 | length 812.4
  Component Side w5: U2.H8@190.33,-183.25 206.08,-167.5 234.82,-167.5 252.96,-185.64 252.96,-215.64 269.82,-232.5 v1(269.82,-242.5) ; U1.P4@374.39,241.16 v1(387.19,228.37)
  Inner Layer 2 w5: v1(387.19,228.37) 387.78,228.37 400.28,215.87 400.28,197.6 407.6,190.27 407.91,190.27 408.5,189.68 417.95,189.68 425.28,182.36 425.28,172.91 472.32,125.86 472.32,70.41 493.82,48.91 493.82,-33.5 456.32,-71 441.77,-71 381.82,-130.95 381.82,-144.09 342.32,-183.59 342.32,-207.68 335,-215 326.92,-215 297.92,-244 v1@269.82,-244 ; v1@269.07,-243.25 v1(269.82,-242.5) ; v1@269.07,-243.25 268.32,-244 v1@269.82,-244 ; v1@269.07,-243.25 v1@269.82,-244 ; v1@269.07,-243.25 268.32,-242.5 v1(269.82,-242.5) ; v1@269.82,-244 v1(269.82,-242.5)
DRAM_D8: U1.F1 U2.D7 | length 790.2
  Component Side w5: v1(104.82,107.5) 105.18,107.5 117.5,119.82 117.5,120.18 126.32,129 146.32,129 169.66,152.34 U1.F1@169.66,164.39 ; v1(109.82,-312.5) 109.82,-314.82 122.32,-327.32 122.32,-327.68 129.64,-335 143.68,-335 152.72,-325.96 205.1,-325.96 U2.D7@221.83,-309.23
  Inner Layer 2 w5: v1(104.82,107.5) 94.82,107.5 cw(c94.82,112.5) 89.82,112.5 89.82,127.5 ccw(c84.82,127.5) 84.82,132.5 ccw(c84.82,128) 80.32,128 80.32,58.5 74.32,52.5 74.32,39 85.82,27.5 85.82,14 74.32,2.5 74.32,-11 85.82,-22.5 85.82,-36 74.32,-47.5 74.32,-62 84.82,-72.5 84.82,-87.5 74.82,-97.5 74.82,-112.5 85.82,-123.5 85.82,-136 74.32,-147.5 74.32,-161 85.82,-172.5 85.82,-188.82 63.32,-211.32 63.32,-245.55 75.32,-257.55 75.32,-278 v1(109.82,-312.5)
DRAM_D9: U1.F2 U2.C3 | length 797.6
  Component Side w5: v1(156.87,177.18) U1.F2@169.66,189.98 ; v1(304.82,-357.5) 304.82,-354.64 333.9,-354.64 U2.C3@347.81,-340.73
  Inner Layer 2 w5: v1(156.87,177.18) 156.87,175.45 ccw(c164.82,175.45) 164.82,167.5 168.46,167.5 cw(c168.46,162.5) 173.46,162.5 cw(c168.46,162.5) 168.46,157.5 159.82,157.5 ccw(c159.82,152.5) 154.82,152.5 ccw(c159.82,152.5) 159.82,147.5 168.46,147.5 cw(c168.46,142.5) 173.46,142.5 cw(c168.46,142.5) 168.46,137.5 164.82,137.5 ccw(c164.82,133.64) 160.96,133.64 160.96,127.5 cw(c155.96,127.5) 155.96,122.5 149.32,122.5 ccw(c149.32,117.5) 144.32,117.5 ccw(c149.32,117.5) 149.32,112.5 152.5,112.5 170.32,94.68 170.32,-130.13 170.32,-171.59 153.32,-188.59 153.32,-243.68 264.64,-355 274.82,-355 ccw(c274.82,-347.5) 282.32,-347.5 282.32,-345 cw(c289.82,-345) 289.82,-337.5 cw(c289.82,-345) 297.32,-345 297.32,-350 ccw(c304.82,-350) v1(304.82,-357.5) v1@302.32,-355
DRAM_D10: U1.G3 U2.C8 | length 778
  Component Side w5: v1(109.82,-332.5) 109.82,-340.18 129.64,-360 140,-360 142.54,-357.46 173.61,-357.46 U2.C8@190.33,-340.73 ; v1(182.46,202.77) U1.G3@195.26,215.57
  Inner Layer 2 w5: v1(109.82,-332.5) 66.32,-289 66.32,-261.28 54.32,-249.28 54.32,-207.59 76.82,-185.09 76.82,-176.5 65.32,-165 65.32,62.19 70.61,67.47 70.61,134.19 78.66,142.24 94.56,142.24 99.82,147.5 99.82,163.41 126.1,189.68 169.37,189.68 v1(182.46,202.77)
DRAM_D11: U1.E2 U2.A3 | length 794.4
  Component Side w5: v1(131.28,177.18) U1.E2@144.07,189.98 ; v1(324.82,-402.5) 326.04,-403.72 U2.A3@347.81,-403.72
  Inner Layer 2 w5: v1@129.82,175.73 cw(c131.28,175.73) v1(131.28,177.18) 131.28,171.04 ccw(c134.82,171.04) 134.82,167.5 139.82,167.5 cw(c139.82,162.5) 144.82,162.5 cw(c139.82,162.5) 139.82,157.5 114.82,157.5 ccw(c114.82,152.5) 109.82,152.5 ccw(c114.82,152.5) 114.82,147.5 119.82,147.5 cw(c119.82,141) 126.32,141 126.32,90.55 152.32,64.55 152.32,-164.14 135.32,-181.14 135.32,-251.13 257.19,-373 274.46,-373 303.96,-402.5 v1(324.82,-402.5)
DRAM_D12: U1.E4 U2.B8 | length 778.5
  Component Side w5: v1(131.28,228.37) U1.E4@144.07,241.16 ; v1(174.82,-387.5) 190.1,-372.22 U2.B8@190.33,-372.22
  Inner Layer 2 w5: v1(131.28,228.37) 118.19,215.28 118.19,197.6 110.87,190.27 100.27,190.27 92.6,182.6 92.6,172.01 83.09,162.5 72.74,162.5 67.01,156.77 67.01,146.42 55.82,135.23 55.82,129.58 61.61,123.8 61.61,89.01 56.5,83.91 56.5,66.09 56.32,65.92 56.32,-168.73 56.5,-168.91 56.5,-192.69 45.32,-203.87 45.32,-253 57.32,-265 57.32,-297.68 147.14,-387.5 v1(174.82,-387.5)
DRAM_D13: U1.D1 U2.A2 | length 788.5
  Component Side w5: v1(105,125) 118.48,138.48 U1.D1@118.48,164.39 ; v1(364.82,-417.5) 379.31,-403.01 U2.A2@379.31,-403.72
  Inner Layer 2 w5: v1(105,125) 117.32,112.68 117.32,86.82 127.32,76.82 127.32,-145 113.82,-158.5 113.82,-231.18 107.32,-237.68 107.32,-255 112.32,-260 131.46,-260 256.28,-384.82 273.56,-384.82 306.23,-417.5 v1(364.82,-417.5)
DRAM_D14: U1.E1 U2.C2 | length 791.3
  Component Side w5: v1(139.82,142.5) 144.07,146.75 U1.E1@144.07,164.39 ; v1(362.54,-357.5) U2.C2@379.31,-340.73
  Inner Layer 2 w5: v1(139.82,142.5) 135.32,138 135.32,94.28 161.32,68.28 161.32,-167.87 144.32,-184.87 144.32,-247.41 260.92,-364 279.46,-364 302.96,-387.5 334.82,-387.5 cw(c334.82,-392.5) 339.82,-392.5 339.82,-402.5 ccw(c344.82,-402.5) 344.82,-407.5 ccw(c344.82,-402.5) 349.82,-402.5 349.82,-370.22 cw(c362.54,-370.22) v1(362.54,-357.5)
DRAM_D15: U1.D2 U2.A7 | length 803.8
  Component Side w5: v1(35,95) 39.66,95 104.62,159.96 104.62,176.12 U1.D2@118.48,189.98 ; U2.A7@221.83,-403.72 218.94,-406.61 v1(234.82,-422.5)
  Inner Layer 2 w5: v1(35,95) 35,-188.73 27.32,-196.41 27.32,-280.41 169.42,-422.5 v1(234.82,-422.5)
DRAM_D16: U1.Y4 U3.D7 | length 958.3
  Component Side w5: v1(504.82,-112.5) 517.32,-100 517.32,-87.32 481.56,-51.56 481.56,31.56 502.5,52.5 537.5,52.5 554.82,69.82 554.82,214.27 U1.Y4@527.93,241.16
  Inner Layer 2 w5: v1(309.82,-332.5) 312.14,-332.5 319.82,-324.82 332.5,-324.82 347.32,-310 347.32,-287.32 363.64,-271 376.32,-271 479.82,-167.5 519.82,-167.5 ccw(c519.82,-162.5) 524.82,-162.5 ccw(c519.82,-162.5) 519.82,-157.5 494.82,-157.5 cw(c494.82,-152.5) 489.82,-152.5 cw(c494.82,-152.5) 494.82,-147.5 524.82,-147.5 ccw(c524.82,-142.5) 529.82,-142.5 ccw(c524.82,-142.5) 524.82,-137.5 506.32,-137.5 cw(c506.32,-132.5) 501.32,-132.5 cw(c506.32,-132.5) 506.32,-127.5 519.82,-127.5 ccw(c519.82,-122.5) 524.82,-122.5 ccw(c514.82,-122.5) 514.82,-112.5 v1(504.82,-112.5)
  Solder Side w5: v1(309.82,-332.5) 312.68,-329.64 327.4,-329.64 U3.D7@347.81,-309.23
DRAM_D17: U1.W4 U3.A7 | length 942
  Component Side w5: U1.W4@502.34,241.16 v1(515.14,228.37)
  Inner Layer 2 w5: v1(379.82,-430) 404.82,-405 452.73,-405 460.05,-397.68 460.05,-383.11 518.16,-325 527.78,-325 540.28,-312.5 559.82,-312.5 ccw(c559.82,-307.5) 564.82,-307.5 564.82,-292.5 cw(c569.82,-292.5) 569.82,-287.5 cw(c569.82,-292.5) 574.82,-292.5 574.82,-307.5 ccw(c579.82,-307.5) 579.82,-312.5 ccw(c579.82,-307.5) 584.82,-307.5 584.82,138.31 527.64,195.5 527.64,215.87 v1(515.14,228.37)
  Solder Side w5: U3.A7@347.81,-403.72 347.81,-420.49 357.32,-430 v1(379.82,-430)
DRAM_D18: U1.Y3 U3.A2 | length 953.8
  Component Side w5: U1.Y3@527.93,215.57 v1(540.73,202.77)
  Inner Layer 1 w5: v1(249.82,-437.5) 320.23,-437.5 353.23,-404.5 387.82,-404.5 414.82,-377.5 441.57,-377.5 570.01,-249.06 570.01,173.49 v1(540.73,202.77)
  Solder Side w5: U3.A2@190.33,-403.72 224.11,-437.5 v1(249.82,-437.5)
DRAM_D19: U1.U4 U3.B8 | length 960.4
  Component Side w5: U1.U4@451.16,241.16 v1(463.96,228.37)
  Inner Layer 2 w5: v1(447.55,-392.5) 447.55,-344.77 459.82,-332.5 494.82,-332.5 ccw(c494.82,-327.5) 499.82,-327.5 ccw(c494.82,-327.5) 494.82,-322.5 474.82,-322.5 ; v1(463.96,228.37) 477.05,215.27 494.73,215.27 502.05,207.95 502.05,195.27 523.76,173.57 536.84,173.57 575.82,134.58 575.82,-264.23 527.81,-312.24 474.82,-312.24 ccw(c474.82,-317.5) 469.56,-317.5 ccw(c474.56,-317.5) 474.56,-322.5
  Solder Side w5: U3.B8@379.31,-372.22 394.59,-387.5 394.59,-408.38 407.32,-421.12 416.2,-421.12 444.82,-392.5 v1(447.55,-392.5)
DRAM_D20: U1.W3 U3.A3 | length 936.5
  Component Side w5: U1.W3@502.34,215.57 v1(515.14,202.77)
  Inner Layer 1 w5: v1(254.82,-417.5) 327.5,-417.5 349.5,-395.5 384.09,-395.5 411.09,-368.5 437.84,-368.5 560.5,-245.84 560.5,89.5 549.82,100.18 549.82,104.82 559.82,114.82 559.82,120.18 549.82,130.18 549.82,137.5 560.32,148 560.32,157.59 ccw(c550.41,157.59) 550.41,167.5 524.82,167.5 cw(c524.82,177.18) 515.14,177.18 v1(515.14,202.77)
  Solder Side w5: U3.A3@221.83,-403.72 241.83,-403.72 254.82,-416.71 v1(254.82,-417.5)
DRAM_D21: U1.Y2 U3.C3 | length 937.4
  Component Side w5: U1.Y2@527.93,189.98 544.82,173.09 544.82,108.18 536.64,100 v1(535,100)
  Inner Layer 1 w5: v1(264.82,-397.5) 274.82,-397.5 ccw(c274.82,-392.5) 279.82,-392.5 279.82,-377.5 cw(c284.82,-377.5) 284.82,-372.5 cw(c284.82,-377.5) 289.82,-377.5 289.82,-402.5 ccw(c294.82,-402.5) 294.82,-407.5 ccw(c294.82,-402.5) 299.82,-402.5 299.82,-397.09 cw(c307.92,-397.09) 307.92,-389 333.73,-389 336.23,-386.5 380.37,-386.5 407.37,-359.5 434.12,-359.5 551.5,-242.12 551.5,83.5 v1(535,100)
  Solder Side w5: U3.C3@221.83,-340.73 221.83,-349.51 264.82,-392.5 v1(264.82,-397.5)
DRAM_D22: U1.T4 U3.C8 | length 946.6
  Component Side w5: U1.T4@425.57,241.16 v1(438.37,228.37)
  Inner Layer 2 w5: v1(438.37,228.37) 451.46,215.28 451.46,197.6 459.37,189.68 494.73,189.68 519.84,164.57 533.11,164.57 566.82,130.86 566.82,-260.5 544.82,-282.5 539.82,-282.5 cw(c539.82,-277.5) 534.82,-277.5 534.82,-267.5 ccw(c529.82,-267.5) 529.82,-262.5 ccw(c529.82,-267.5) 524.82,-267.5 524.82,-297.5 cw(c519.82,-297.5) 519.82,-302.5 cw(c519.82,-297.5) 514.82,-297.5 514.82,-267.5 ccw(c509.82,-267.5) 509.82,-262.5 ccw(c509.82,-267.5) 504.82,-267.5 504.82,-277.5 cw(c499.82,-277.5) 499.82,-282.5 v1(459.82,-282.5)
  Solder Side w5: U3.C8@379.31,-340.73 396.08,-357.5 404.65,-357.5 404.69,-357.46 419.87,-357.46 459.82,-317.5 v1(459.82,-282.5)
DRAM_D23: U1.W2 U3.C2 | length 952.1
  Component Side w5: U1.W2@502.34,189.98 513.76,178.56 513.76,113.96 522.35,105.38 522.35,92.7 ; 522.32,92.68 522.32,90.32 528.64,84 v1(530.45,84)
  Inner Layer 1 w5: v1@272.14,-342.5 v1(269.82,-342.5) cw(c259.82,-342.5) 259.82,-352.5 244.82,-352.5 ccw(c244.82,-357.5) 239.82,-357.5 ccw(c244.82,-357.5) 244.82,-362.5 292.14,-362.5 309.64,-380 330,-380 332.5,-377.5 376.64,-377.5 403.64,-350.5 430.39,-350.5 542.5,-238.39 542.5,72.5 531.45,83.55 530,83.55 v1(530.45,84)
  Solder Side w5: U3.C2@190.33,-340.73 205.1,-325.96 240.61,-325.96 257.14,-342.5 v1(269.82,-342.5)
DRAM_D24: U1.D3 U3.E3 | length 898.5
  Component Side w5: v1(105.69,202.77) U1.D3@118.48,215.57
  Inner Layer 2 w5: v1(44.82,-272.5) 36.32,-264 36.32,-200.14 47.32,-189.14 47.32,69.64 47.5,69.82 47.5,87.63 52.5,92.63 52.5,120.18 40,132.68 40,160 ccw(c35,160) 35,165 15,165 cw(c15,170) 10,170 cw(c15,170) 15,175 35,175 ccw(c35,180) 40,180 ccw(c35,180) 35,185 15,185 cw(c15,190.18) 9.82,190.18 9.82,202.5 22.6,215.27 93.19,215.27 v1(105.69,202.77)
  Solder Side w5: v1(44.82,-272.5) 44.82,-287.5 57.32,-300 142.32,-300 149.82,-292.5 164.96,-292.5 184.21,-292.5 207.06,-292.5 U3.E3@221.83,-277.74
DRAM_D25: U1.B3 U3.F7 | length 911
  Component Side w5: v1(54.51,202.77) U1.B3@67.3,215.57
  Inner Layer 1 w5: v1(54.51,202.77) 54.51,196.78 33.01,175.28 33.01,142.69 56.5,119.2 56.5,54.41 56.32,54.23 56.32,18.59 40.32,2.59 40.32,-125.73 111.09,-196.5 124.23,-196.5 141.32,-213.59 141.32,-224 164.82,-247.5 224.82,-247.5 cw(c224.82,-252.5) 229.82,-252.5 cw(c224.82,-252.5) 224.82,-257.5 199.82,-257.5 ccw(c199.82,-262.5) 194.82,-262.5 ccw(c199.82,-262.5) 199.82,-267.5 224.82,-267.5 cw(c224.82,-272.5) 229.82,-272.5 cw(c224.82,-272.5) 224.82,-277.5 209.82,-277.5 ccw(c209.82,-282.5) 204.82,-282.5 ccw(c209.82,-282.5) 209.82,-287.5 237.14,-287.5 244.64,-295 270.46,-295 276.46,-301 297.32,-301 300.82,-297.5 v1(299.82,-297.5)
  Solder Side w5: v1(299.82,-297.5) 299.82,-295.18 347.81,-247.19 U3.F7@347.81,-246.24
DRAM_D26: U1.A3 U3.G2 | length 898.8
  Component Side w5: v1(24.82,197.5) 24.82,199 41.39,215.57 U1.A3@41.71,215.57
  Inner Layer 1 w5: v1(15,-185) -2.68,-167.32 -2.68,-140 4.32,-133 4.32,110.68 -2.68,117.68 -2.68,171.5 23.32,197.5 v1(24.82,197.5)
  Solder Side w5: v1(15,-185) 19.82,-189.82 19.82,-247.5 ccw(c24.82,-247.5) 24.82,-252.5 ccw(c24.82,-247.5) 29.82,-247.5 29.82,-195 cw(c34.82,-195) 34.82,-190 cw(c34.82,-195) 39.82,-195 39.82,-247.5 ccw(c44.82,-247.5) 44.82,-252.5 ccw(c44.82,-247.5) 49.82,-247.5 49.82,-192.5 cw(c54.82,-192.5) 54.82,-187.5 cw(c54.82,-192.5) 59.82,-192.5 59.82,-222.69 77.14,-240 105,-240 113.53,-231.47 173.61,-231.47 U3.G2@190.33,-214.74